# Altium PCB project_1_1.PcbDoc
Units mil, origin at the board's own origin, x right, y up, seen from the top; angles counter-clockwise.
Board outline 3660.31 x 1534.33 mil, 2 copper layers (Top Layer, Bottom Layer); 13 components, 19 nets, 90 pads, 6 vias.
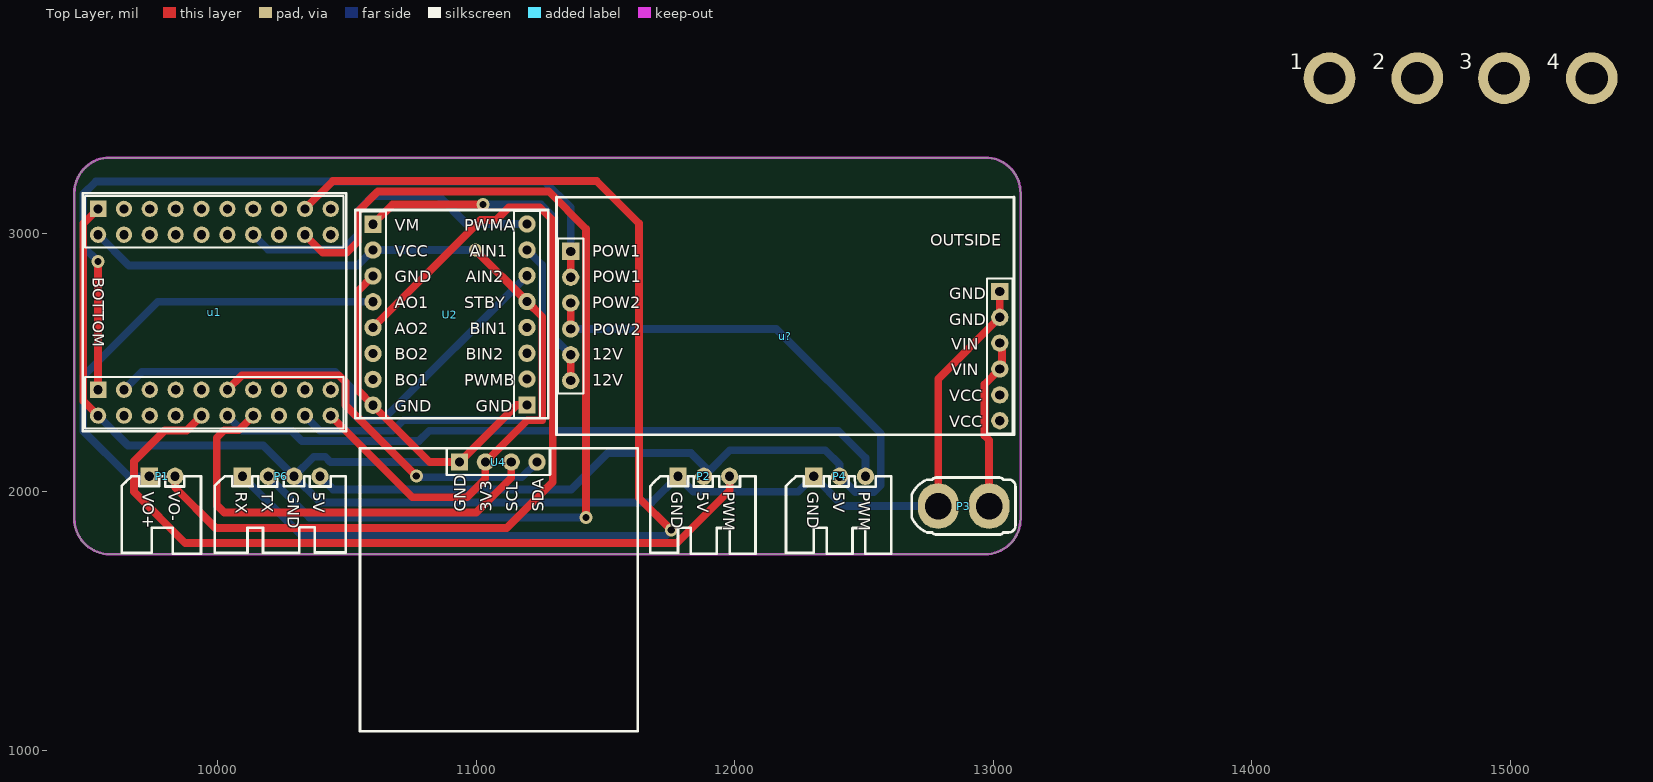
[diagram p0: Top Layer view]
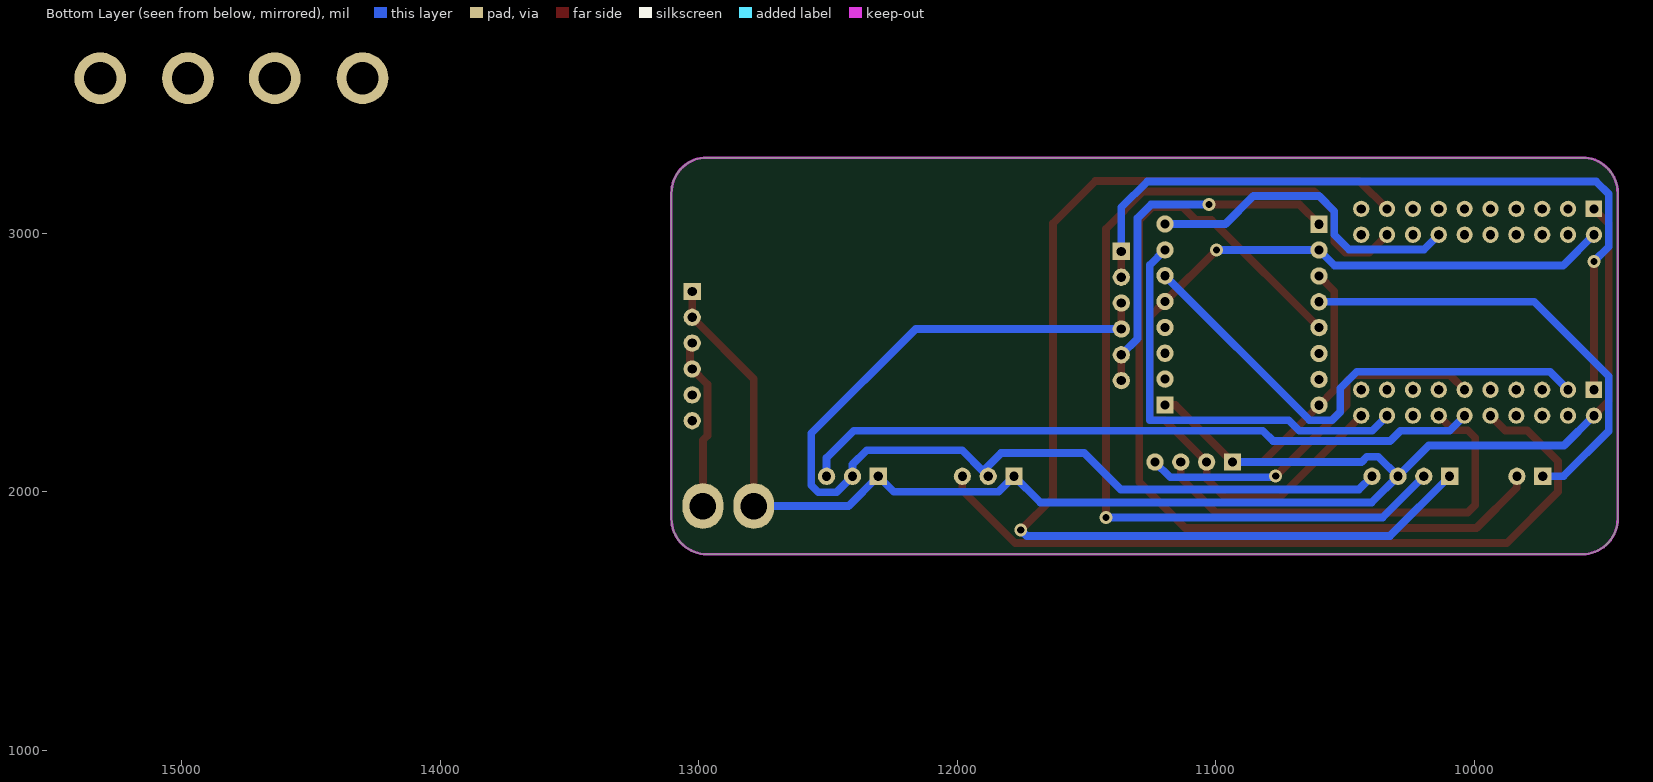
[diagram p1: Bottom Layer view, seen from below]

## Layer stack, top to bottom
Top Solder: solder mask 0.4, Solder Resist, Dk 3.5
Top Layer: signal copper 1.4
Dielectric 1: dielectric 12.6, FR-4, Dk 4.8
Bottom Layer: signal copper 1.4
Bottom Solder: solder mask 0.4, Solder Resist, Dk 3.5

## Board outline
9445,1895.88 9445,3155.73 cw(c9582.24,3155.73) 9582.24,3292.97 12968.07,3292.97 cw(c12968.07,3155.73) 13105.31,3155.73 13105.31,1895.88 cw(c12968.07,1895.88) 12968.07,1758.64 9582.24,1758.64 cw(c9582.24,1895.88)

## Design rules (kind name [scope] priority, off if disabled: settings)
Clearance [All] p1: gap=10 ignorepadtopadclearanceinfootprint=FALSE
PolygonConnect [All] p1: connectstyle=Relief reliefconductorwidth=10 reliefentries=4 polygonreliefangle="90 Angle" airgapwidth=10
RoutingVias [All] p1: holewidth=28 width=50 viastyle="Through Hole" minholewidth=28 minwidth=50 maxholewidth=28 maxwidth=50
SolderMaskExpansion [All] p1: expansion=4 istentingtop=FALSE
SupplyNets "Schematic Supply Nets_4" [InNet('5V_MCU')] p1: voltage=0.000
SupplyNets "Schematic Supply Nets_5" [InNet('5V')] p2: voltage=0.000
SupplyNets "Schematic Supply Nets_3" [InNet('12V')] p3: voltage=0.000
SupplyNets "Schematic Supply Nets_2" [InNet('VIN+')] p4: voltage=0.000
SupplyNets "Schematic Supply Nets_1" [InNet('GND')] p5: voltage=0.000
SupplyNets "Schematic Supply Nets" [InNet('3V3')] p6: voltage=0.000
Width [All] p1: maxlimit=100 minlimit=30 preferedwidth=30 minimp=50.000000 maximp=50.000000 favimp=50.000000
30 further rules are at their usual default settings.

## Components (designator, comment, footprint, x,y, rotation, side; value= is the part's Value field where it differs from the comment)
1 "M3" "M3 125X200" 14300,3600 r90 top
2 "M3" "M3 125X200" 14640,3600 r90 top
3 "M3" "M3 125X200" 14975,3600 r90 top
4 "M3" "M3 125X200" 15315,3600 r90 top
P1 "port_mot_2p" XH2.54_2P 9790,1935 r180 top
P2 "port_pwm_3p" XH2.54_3P 11865,1925 r180 top
P3 "port_xt30" MOD_XT30 12885,1945 r180 top
P4 "port_pwm_3p" XH2.54_3P 12390,1925 r180 top
P6 "port_uart_4p" XH2.54_4P 10240,1905 r180 top
u1 "f1_hw_1" f1_hw_1 9977.04,2709.49 r270 top
U2 "mod_tb6612" MOD_TB6612 10905,2685 r0 top
U4 "mod_oled" mod_oled 11089.91,2113.15 r0 top
u? "pow_hw_2" POW_HW_2 12140,2700 r0 top

## Footprints (in the part's own frame and the unit in brackets; to place one, negate y for a bottom-side part, rotate by r counter-clockwise, add the part's x,y. Pads: shape width x height; smd on the part's side, far side on the other; paste and mask are expansions set on the pad)
f1_hw_1 [mm] "f1_hw_1"
  rect 1.6x1.6 hole 0.9: 1(-9.779,-11.176) 21(8.001,-11.176)
  round 1.6 hole 0.9: 2(-7.239,-11.176) 3(-9.779,-8.636) 4(-7.239,-8.636) 5(-9.779,-6.096) 6(-7.239,-6.096) 7(-9.779,-3.556) 8(-7.239,-3.556) 9(-9.779,-1.016) 10(-7.239,-1.016) 11(-9.779,1.524) 12(-7.239,1.524) 13(-9.779,4.064) 14(-7.239,4.064) 15(-9.779,6.604) 16(-7.239,6.604) 17(-9.779,9.144) 18(-7.239,9.144) 19(-9.779,11.684) 20(-7.239,11.684) 22(10.541,-11.176) 23(8.001,-8.636) 24(10.541,-8.636) 25(8.001,-6.096) 26(10.541,-6.096) 27(8.001,-3.556) 28(10.541,-3.556) 29(8.001,-1.016) 30(10.541,-1.016) 31(8.001,1.524) 32(10.541,1.524) 33(8.001,4.064) 34(10.541,4.064) 35(8.001,6.604) 36(10.541,6.604) 37(8.001,9.144) 38(10.541,9.144) 39(8.001,11.684) 40(10.541,11.684)
  silkscreen extent -11.3,-12.7 12.07,13.21, body extent -11.3,-12.7 12.07,13.21, height 8.5
"M3 125X200" [mil] "M3螺丝孔，孔125Mil，焊盘200Mil"
  round 200 hole 125: 1(0,0)
mod_oled [mm] "外购屏幕模块接口"
  rect 1.7x1.7 hole 0.9: 1(-3.935,0.047)
  round 1.7 hole 0.9: 2(-1.395,0.047) 3(1.145,0.047) 4(3.685,0.047)
  silkscreen extent -13.72,-26.4 13.58,1.4, body extent -13.72,-26.42 13.59,1.4, height 8.5
MOD_TB6612 [mm]
  rect 1.7x1.7 hole 0.9: 1(-7.747,8.89) 16(7.391,-8.867)
  round 1.7 hole 0.9: 2(-7.747,6.35) 3(-7.747,3.81) 4(-7.747,1.27) 5(-7.747,-1.27) 6(-7.747,-3.81) 7(-7.747,-6.35) 8(-7.747,-8.89) 9(7.391,8.913) 10(7.391,6.373) 11(7.391,3.833) 12(7.391,1.293) 13(7.391,-1.247) 14(7.391,-3.787) 15(7.391,-6.327)
  silkscreen extent -9.5,-10.16 9.5,10.29, body extent -9.5,-10.16 9.5,10.29, height 8.5
MOD_XT30 [mm]
  oval 4x4.5 hole 2.6: 1(-2.5,0) 2(2.5,0)
  silkscreen extent -5.1,-2.8 5.1,2.8, body extent -5.1,-2.8 5.1,2.8, height 10.71
POW_HW_2 [mm] "pow_hw_2"
  round 1.7 hole 0.9: 0(22.479,-10.795) 0(22.479,-8.255) 1(22.479,-5.715) 1(22.479,-3.175) 2(22.479,-0.635) 3(-19.685,-6.858) 3(-19.685,-4.318) 4(-19.685,-1.778) 4(-19.685,0.762) 5(-19.685,3.302)
  rect 1.7x1.7 hole 0.9: 2(22.479,1.905) 5(-19.685,5.842)
  silkscreen extent -21.08,-12.19 23.88,11.18, body extent -21.08,-12.19 23.88,11.18, height 8.5
XH2.54_2P [mm]
  rect 1.7x1.7 hole 0.9: 1(1.397,-3.175)
  round 1.7 hole 0.9: 2(-1.143,-3.175)
  silkscreen extent -3.68,-3.18 4.11,4.44, body extent -3.64,-3.52 3.9,4.17, height 5.73
XH2.54_3P [mm]
  rect 1.7x1.7 hole 0.9: 1(2.159,-3.429)
  round 1.7 hole 0.9: 2(-0.381,-3.429) 3(-2.921,-3.429)
  silkscreen extent -5.46,-3.43 4.88,4.19, body extent -5.42,-3.78 4.66,3.92, height 5.73
XH2.54_4P [mm]
  rect 1.7x1.7 hole 0.9: 1(3.683,-3.937)
  round 1.7 hole 0.9: 2(1.143,-3.937) 3(-1.397,-3.937) 4(-3.937,-3.937)
  silkscreen extent -6.48,-3.94 6.4,3.59, body extent -6.44,-4.29 6.18,3.41, height 5.73

## Part data
1 2 3 4: library part prot_m3, "m3铜柱孔", BOM名称=铜柱孔, 学习资源=www.ooocke.com, 版权归属=源创客
P1: "开环直流电机接口 / XH2.54弯排针2p"
P2 P4: "舵机接口 / XH2.54弯排针3p"
P3: "XT30"
P6: "串口接口/SPP蓝牙模块 / XH2.54弯排针4p/4p排母"
u1: "F103C8T6最小系统_1"
U2: "TB6612模块 / 8p排母*2"
U4: "外购屏幕模块"
u?: "两路升降压电源模块 / 6p排母*2"

## Via types
v1: diameter 50, hole 28, Top Layer to Bottom Layer, 6 vias

## Nets (pads, with @x,y where several pads share a name; then routed paths per layer and width w, separated by ;. In a path a pad name is that pad's centre, name@x,y a point inside that pad or via, vN(x,y) a via of type N, cw(c..) or ccw(c..) an arc to the next point about the centre after c; other vN are vias at no path point)
3V3: u1.2 u1.40 U2.2 U2.12 U4.2 | length 3409.3
  Top Layer w30: u1.40 10752.53,1979 10964,1979 11035,2050 U4.2 11197,2277 11255,2277 11255,2676.89 U2.12 v1(10996.89,2935)
  Bottom Layer w30: u1.2 9656.53,2875 10540,2875 U2.2 v1(10996.89,2935)
5V: P2.2 P4.2 P6.4 u?.4 | length 4112.3
  Top Layer w30: u?.4@11365,2630 u?.4@11365,2730
  Bottom Layer w30: P6.4 10446,2009 11367,2009 11508,2150 11830,2150 P2.2@11900,2080 ; u?.4@11365,2630 12160,2630 12564,2226 12564,2025 12537,1998 12467,1998 P4.2 12405,2106 12350,2161 11981,2161 P2.2@11900,2080 ; P2.2 P2.2@11900,2080
5V_MCU: u1.21 u?.5 | length 2997.4
  Top Layer w30: u1.21 v1(9537.04,2890.96) ; u?.5@11365,2830 u?.5@11365,2930
  Bottom Layer w30: v1(9537.04,2890.96) 9480,2948 9480,3152 9528,3200 11265,3200 11365,3100 u?.5@11365,2930
12V: U2.1 u?.3 | length 1410.1
  Top Layer w30: U2.1 10676,3111 v1(11026,3111) ; u?.3@11365,2430 u?.3@11365,2530
  Bottom Layer w30: v1(11026,3111) 11250,3111 11302,3059 11302,2593 u?.3@11365,2530
AIN1: u1.38 U2.10 | length 1642.1
  Bottom Layer w30: u1.38 10394.99,2236.53 10677,2236.53 10717.47,2277 11255,2277 11255,2876.89 U2.10
AIN2: u1.23 U2.11 | length 1950.7
  Bottom Layer w30: u1.23 9706.55,2464 10454,2464 10518,2400 10518,2308.53 10550,2276.53 10636.61,2276.53 U2.11
AO1: P1.1 U2.4 | length 1778.8
  Bottom Layer w30: P1.1 9655,2060 9480,2235 9480,2447 9768,2735 U2.4
AO2: P1.2 U2.5 | length 3565.5
  Top Layer w30: P1.2 9835,2016 9991,1860 11118,1860 11296,2038 11296,3050 11245,3101 11126.6,3101 11077.12,3051.52 11016.52,3051.52 U2.5
GND: P2.1 P3.2 P4.1 P6.3 u1.1 u1.22 U2.3 U2.8 U2.16 U4.1 u?.2 | length 7311.4
  Top Layer w30: u1.22 9480,2351.53 9480,3037.45 u1.1 ; U2.3 10541,2776 10541,2394 U2.8 10820,2115 U4.1 11155.91,2335.91 U2.16 ; P3.2 12786.57,2436.57 13025,2675 u?.2@13025,2775
  Bottom Layer w30: u1.22 9652.53,2179 10176,2179 P6.3 ; U4.1 10436,2115 10415,2136 10371,2136 P6.3 ; P3.2 12420,1945 P4.1 12245,2000 11840,2000 P2.1 11679,1959 10396,1959 P6.3
PWM1: P2.3 u1.30 | length 2976.7
  Top Layer w30: u1.30 9879.55,2237 9795,2237 9676,2118 9676,2000 9874.43,1801.57 11775,1801.57 11980,2006.57 P2.3
PWM2: P4.3 u1.32 | length 2640.4
  Bottom Layer w30: u1.32 10094.99,2236.53 10285.25,2236.53 10325.25,2196.53 10777.93,2196.53 10817.93,2236.53 12400.47,2236.53 12505,2132 P4.3
PWMA: u1.14 U2.9 | length 1266.6
  Bottom Layer w30: u1.14 10194.53,2937 10484,2937 10541,2994 10541,3085 10600,3144 10854,3144 10962.09,3035.91 U2.9
RX1: u1.25
RX2: P6.1 u1.17 | length 4406.9
  Top Layer w30: u1.17 10444.47,3201.92 11466.08,3201.92 11629,3039 11629,1977 v1(11754,1852)
  Bottom Layer w30: P6.1 10326,1829 11731,1829 v1(11754,1852)
SCL: u1.34 U4.3 | length 1703.4
  Top Layer w30: u1.34 10080.54,2237.99 10025,2237.99 9996,2208.99 9996,1949 10025,1920 11000,1920 11135,2055 U4.3
SDA: u1.31 U4.4 | length 1462.1
  Top Layer w30: u1.31 10093.55,2451 10468,2451 10494,2425 10494,2335 v1(10768,2061)
  Bottom Layer w30: v1(10768,2061) 10773,2056 11176,2056 U4.4
TX1: u1.24
TX2: P6.2 u1.18 | length 3753
  Top Layer w30: u1.18 10406.53,2925 10498.53,2925 10541,2967.47 10541,3083 10619.92,3161.92 11280.08,3161.92 11424,3018 v1(11424,1901)
  Bottom Layer w30: P6.2 10354,1901 v1(11424,1901)
VIN+: P3.1 u?.1 | length 668.3
  Top Layer w30: P3.1 12983.43,2199.57 12966,2217 12966,2416 13025,2475 13033.02,2483.02 13033.02,2566.98 u?.1@13025,2575
pads on no net: 1.1 2.1 3.1 4.1 u1.3 u1.4 u1.5 u1.6 u1.7 u1.8 u1.9 u1.10 u1.11 u1.12 u1.13 u1.15 u1.16 u1.19 u1.20 u1.26 u1.27 u1.28 u1.29 u1.33 u1.35 u1.36 u1.37 u1.39 U2.6 U2.7 U2.13 U2.14 U2.15 u?.0

## Keep-outs
Keep-Out Layer:
  the board outline again, w10

## Text inside footprints (layer, text, board x,y; h text height)
P1: Top Overlay "VO+" at 9710,2000 h45 r270; Top Overlay "VO-" at 9810,2000 h45 r270
P2: Top Overlay "GND" at 11755,2000 h45 r270; Top Overlay "5V" at 11855,2000 h45 r270; Top Overlay "PWM" at 11955,2000 h45 r270
P4: Top Overlay "GND" at 12280,2000 h45 r270; Top Overlay "5V" at 12380,2000 h45 r270; Top Overlay "PWM" at 12480,2000 h45 r270
P6: Top Overlay "RX" at 10070,2000 h45 r270; Top Overlay "TX" at 10170,2000 h45 r270; Top Overlay "GND" at 10270,2000 h45 r270; Top Overlay "5V" at 10370,2000 h45 r270
u1: Top Overlay "BOTTOM" at 9517.04,2829.49 h45 r270
U2: Top Overlay "VM" at 10685,3010 h45; Top Overlay "VCC" at 10685,2910 h45; Top Overlay "AO1" at 10685,2710 h45; Top Overlay "AO2" at 10685,2610 h45; Top Overlay "BO1" at 10685,2410 h45; Top Overlay "BO2" at 10685,2510 h45; Top Overlay "GND" at 10685,2310 h45; Top Overlay "GND" at 10685,2810 h45; Top Overlay "PWMA" at 10952.5,3010 h45; Top Overlay "AIN1" at 10975,2910 h45; Top Overlay "AIN2" at 10960,2810 h45; Top Overlay "STBY" at 10952.5,2710 h45; Top Overlay "BIN1" at 10975,2610 h45; Top Overlay "BIN2" at 10960,2510 h45; Top Overlay "PWMB" at 10952.5,2410 h45; Top Overlay "GND" at 10997.49,2310 h45
U4: Top Overlay "GND" at 10959.91,1923.15 h45 r90; Top Overlay "SDA" at 11259.91,1923.15 h45 r90; Top Overlay "SCL" at 11159.91,1923.15 h45 r90; Top Overlay "3V3" at 11059.91,1923.15 h45 r90
u?: Top Overlay "OUTSIDE" at 12755.84,2951.23 h45; Top Overlay "VCC" at 12830,2350 h45; Top Overlay "VCC" at 12830,2250 h45; Top Overlay "VIN" at 12837.5,2550 h45; Top Overlay "VIN" at 12837.5,2450 h45; Top Overlay "GND" at 12830,2745 h45; Top Overlay "GND" at 12830,2645 h45; Top Overlay "POW1" at 11447.62,2910 h45; Top Overlay "POW2" at 11447.62,2710 h45; Top Overlay "12V" at 11447.62,2510 h45; Top Overlay "12V" at 11447.62,2410 h45; Top Overlay "POW1" at 11450,2810 h45; Top Overlay "POW2" at 11450,2605 h45